# Altium PCB PCB1.PcbDoc
Units mil, origin at the board's own origin, x right, y up, seen from the top; angles counter-clockwise.
Board outline 4190.03 x 4245.03 mil, 2 copper layers (Top Layer, Bottom Layer); 62 components, 61 nets, 245 pads, 35 vias.
Unrouted connection lines stored in the file: 2.
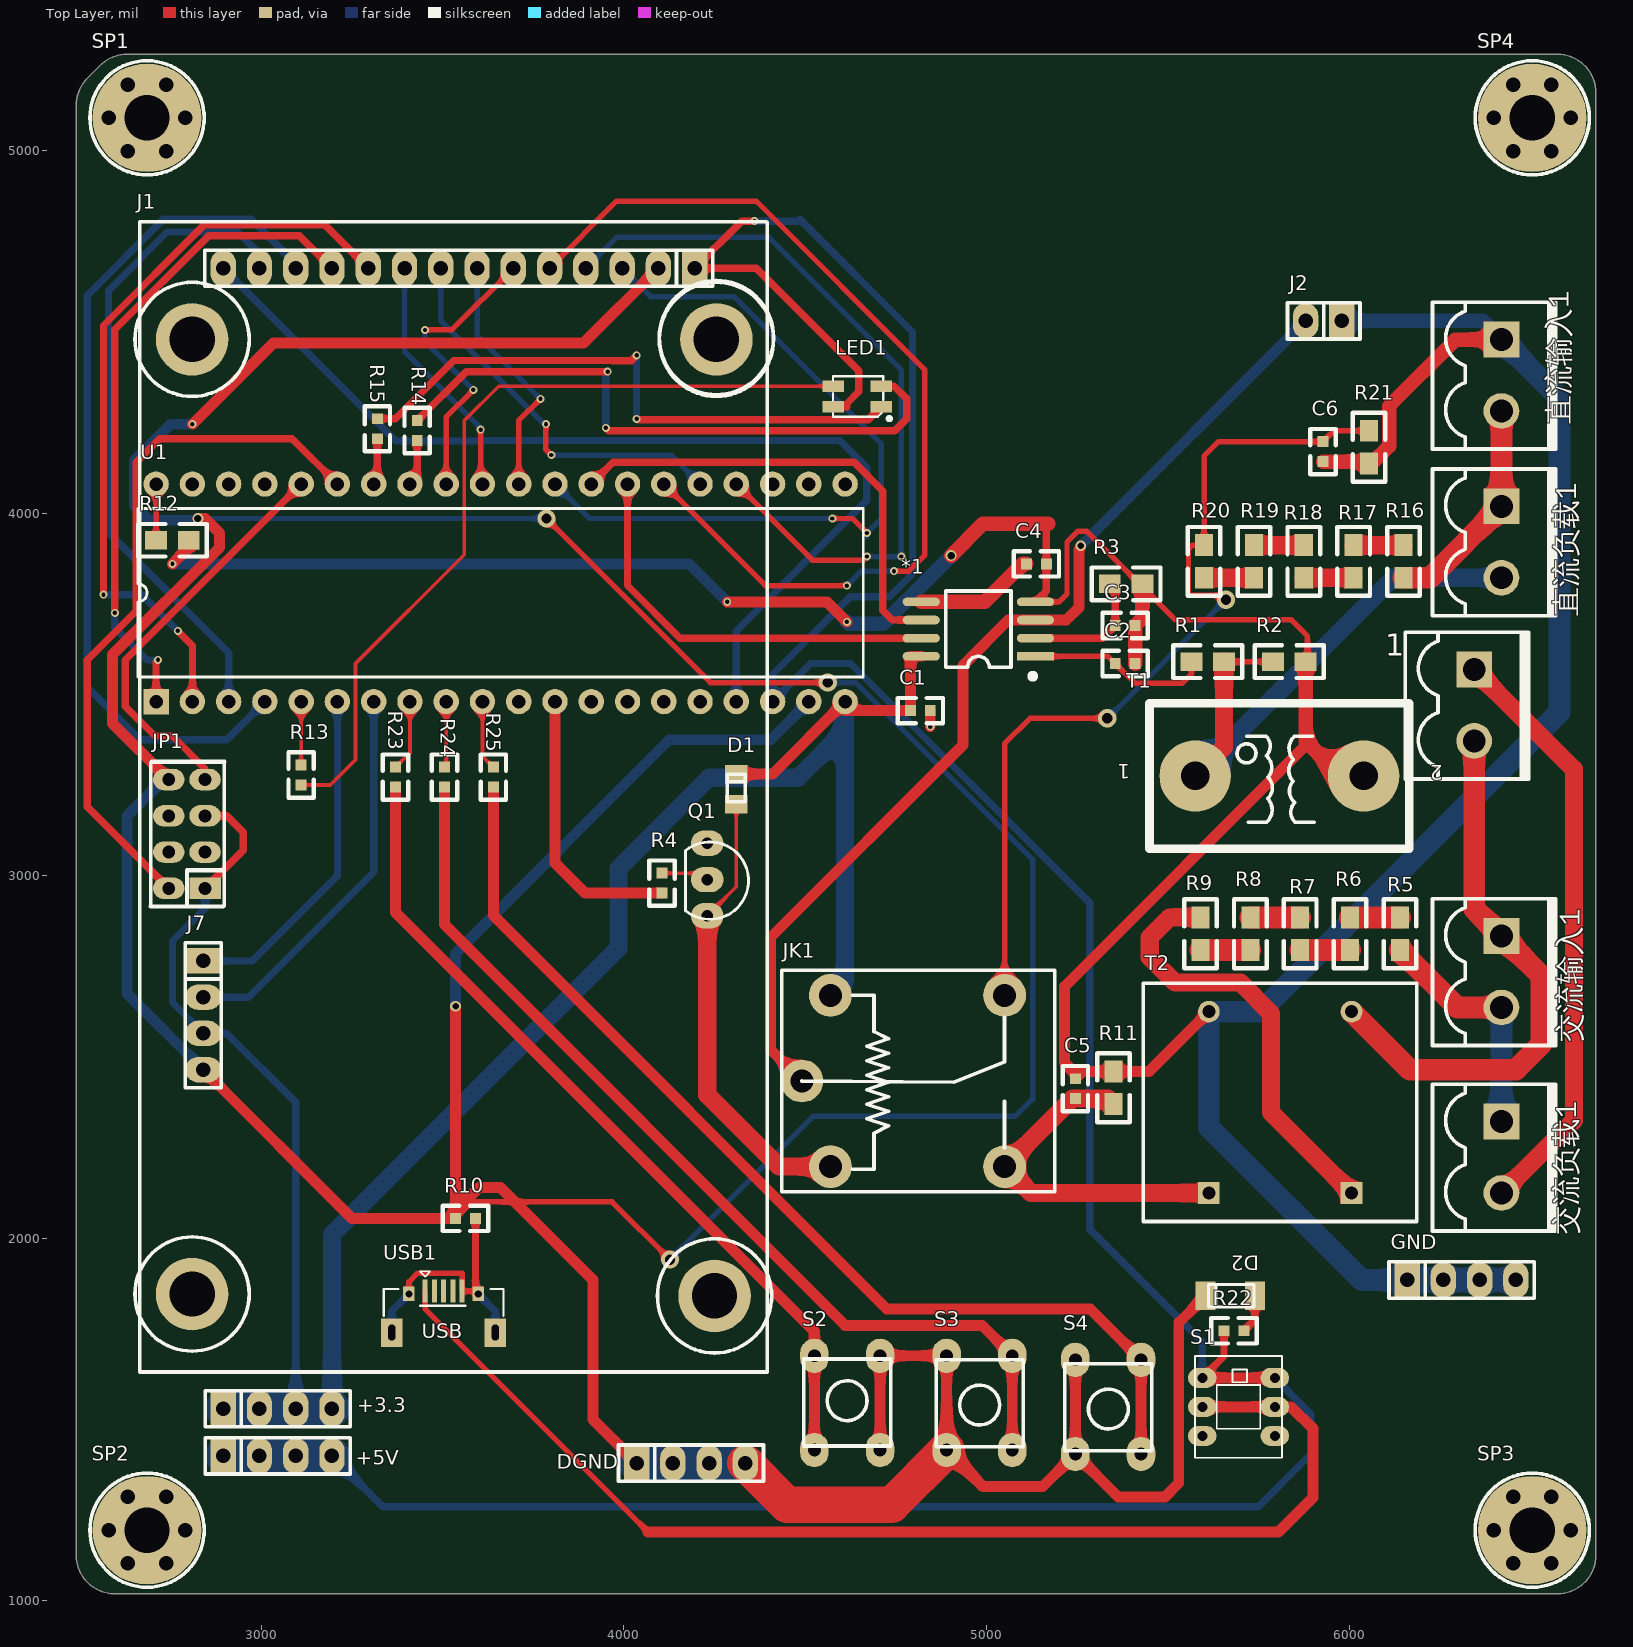
[diagram p0: Top Layer view]
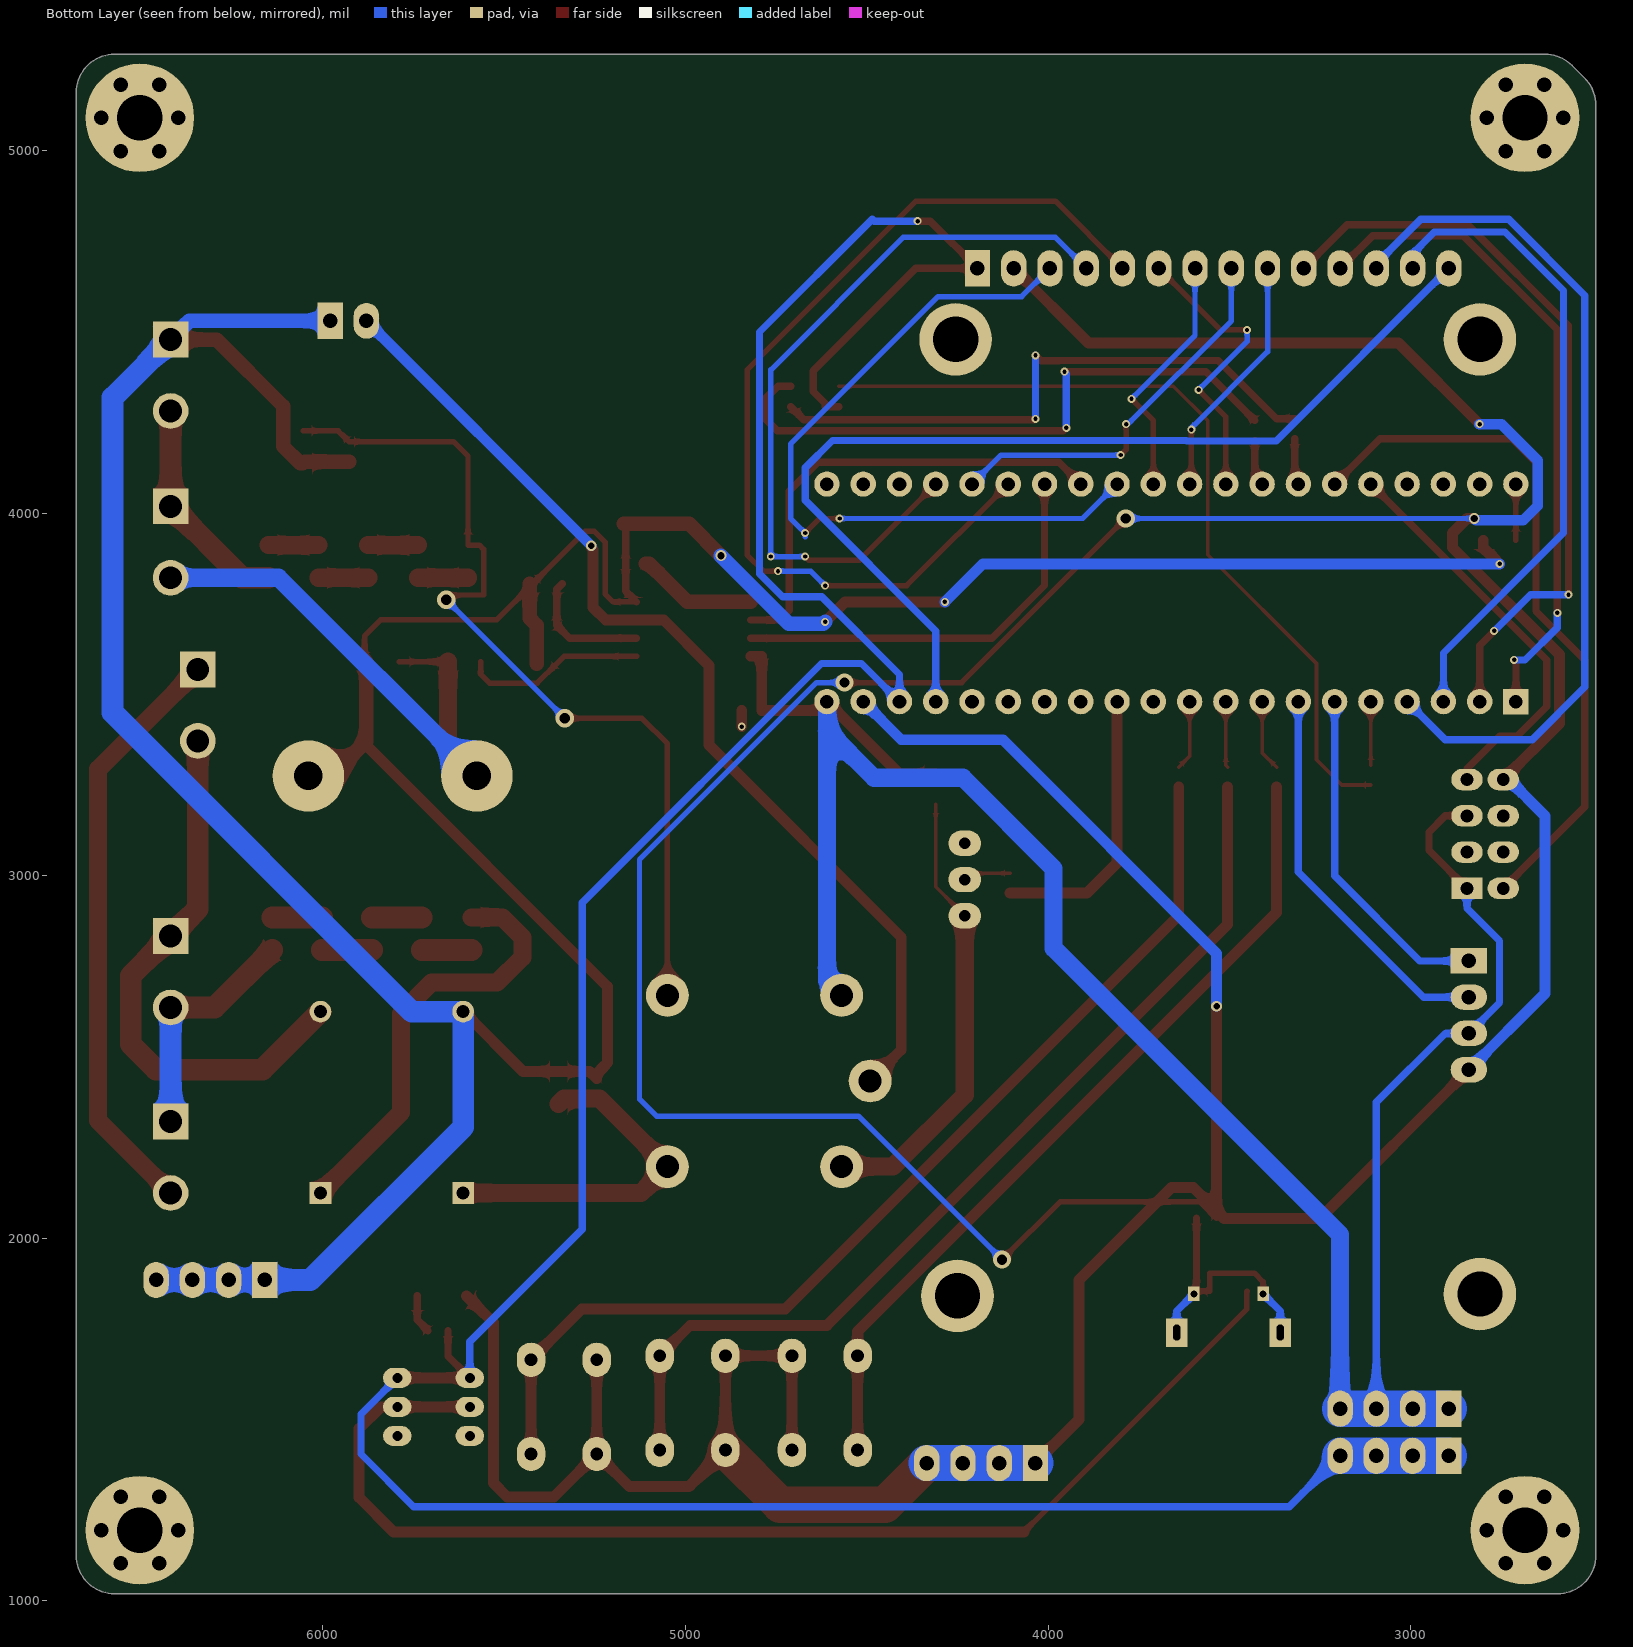
[diagram p1: Bottom Layer view, seen from below]

## Layer stack, top to bottom
Top Solder: solder mask 0.4, Solder Resist, Dk 3.5
Top Layer: signal copper 1.4
Dielectric 1: dielectric 12.6, FR-4, Dk 4.8
Bottom Layer: signal copper 1.4
Bottom Solder: solder mask 0.4, Solder Resist, Dk 3.5

## Board outline
2489.99,1125 2489.99,5125.38 cw(c2595,5125.38) 2520.74,5199.63 2555.37,5234.26 cw(c2629.62,5160) 2629.62,5265.02 6575,5265.02 cw(c6575,5160) 6680.02,5160 6680.02,1125 cw(c6575,1125) 6575,1019.99 2595,1019.99 cw(c2595,1125)

## Design rules (kind name [scope] priority, off if disabled: settings)
Clearance [All] p1: gap=10 ignorepadtopadclearanceinfootprint=FALSE except(0: Arc-Hole Track-Hole SMDPad-Hole THPad-Hole Via-Hole Fill-Hole Poly-Hole Region-Hole Text-Hole)
PolygonConnect [All] p1: connectstyle=Relief reliefconductorwidth=10 reliefentries=4 polygonreliefangle="90 Angle" airgapwidth=10
RoutingVias [All] p1: holewidth=28 width=50 viastyle="Through Hole" minholewidth=28 minwidth=50 maxholewidth=28 maxwidth=50
SolderMaskExpansion [All] p1: expansion=4
Width [All] p1: maxlimit=100 minlimit=10 preferedwidth=15
30 further rules are at their usual default settings.

## Components (designator, comment, footprint, x,y, rotation, side; value= is the part's Value field where it differs from the comment)
1 "导线" KF2EDGK5.0-LI-2P 6345,3470 r270 top
*1 "HLW8110" SOP8W_M 4977.52,3680 r180 top
+3.3 "CON4" sip-4 2895,1530 r0 top
+5V "CON4" sip-4 2895,1400 r0 top
C1 "0.1uf" 0603 4845,3455 r180 top
C2 "330nf" 0603 5355,3585 r0 top
C3 "330nf" 0603 5410,3690 r180 top
C4 "0.1uf" 0603 5110,3860 r0 top
C5 "33nf" 0603 5245,2385 r90 top
C6 "33nf" 0603 5928,4196.82 r270 top
D1 "1N4007" LED_0805 4310,3239.29 r90 top
D2 "LED" LED_1206 5672,1841.3 r180 top
DGND "CON4" sip-4 4035,1380 r0 top
GND "CON4" sip-4 6160,1885 r0 top
J1 "CON14" 2.4TFT 3495,1791.3 r180 top
J2 "测量点" sip-2 5980,4530 r180 top
J7 "CON4" sip-4 2840,2765 r270 top
JK1 "SRD-05VDC-SL-C" SRD-C_B 4569.69,2670 r0 top
JP1 "HEADER 4X2" IDC-8 2845,2965 r90 top
LED1 "RGB-3528" "LED 3528-4Pin" 4643.5,4321.46 r180 top
Q1 "SS8050" TO92A 4230,3089.29 r0 top
R1 "100R" 0805 5655,3590 r180 top
R2 "10R" 0805 5880,3590 r180 top
R3 "100R" 0805 5430,3805 r180 top
R4 "510" 0603 4105,2951.85 r90 top
R5 "20k" 0805 6140,2795 r90 top
R6 "20k" 0805 6002.5,2885 r270 top
R7 "20k" 0805 5865,2795 r90 top
R8 "20k" 0805 5727.5,2885 r270 top
R9 "20k" 0805 5590,2795 r90 top
R10 "0R" 0603 3535.71,2055 r0 top
R11 "100R" 0805 5350,2460 r270 top
R12 "0R" 0805 2800,3925 r180 top
R13 "510" 0603 3110,3305 r270 top
R14 "510" 0603 3430,4200 r90 top
R15 "310" 0603 3320,4205 r90 top
R16 "20K" 0805 6150,3821.57 r90 top
R17 "20K" 0805 6012.5,3911.57 r270 top
R18 "20K" 0805 5875,3821.57 r90 top
R19 "20K" 0805 5737.5,3911.57 r270 top
R20 "20K" 0805 5600,3821.57 r90 top
R21 "1k" 0805 6055,4136.82 r90 top
R22 "510" 0603 5655,1745 r0 top
R23 "510" 0603 3370,3299.29 r270 top
R24 "510" 0603 3505,3299.29 r270 top
R25 "510" 0603 3640,3299.29 r270 top
S1 "SW-DPDT" SWH7*7 5595,1455 r90 top
S2 "SW-PB" SW6*6 4525.41,1416.16 r90 top
S3 "SW-PB" SW6*6 5071.1,1676 r270 top
S4 "SW-PB" SW6*6 5426.1,1665 r270 top
SP1 "M3铜柱" M3x4+6_N 2685,5090 r0 top
SP2 "M3铜柱" M3x4+6_N 2685,1195 r0 top
SP3 "M3铜柱" M3x4+6_N 6505,1195 r0 top
SP4 "M3铜柱" M3x4+6_N 6505,5090 r0 top
T1 "Current transformer" ZMCT103E 5575.43,3275 r180 top
T2 "DA101C" ZMPT101B 5810,2375 r180 top
U1 "STM32F103C8T6核心板" STM32F103C8T6核心板 3650,3885 r90 top
USB1 "USB-5P" USB-MICRO_A 3502.72,1740 r0 top
交流负载1 "负载" KF2EDGK5.0-LI-2P 6420,2223.43 r270 top
交流输入1 "AC_IN" KF2EDGK5.0-LI-2P 6420,2735 r270 top
直流负载1 "负载" KF2EDGK5.0-LI-2P 6420,3920 r270 top
直流输入1 "DC-IN" KF2EDGK5.0-LI-2P 6420,4380 r270 top

## Footprints (in the part's own frame and the unit in brackets; to place one, negate y for a bottom-side part, rotate by r counter-clockwise, add the part's x,y. Pads: shape width x height; smd on the part's side, far side on the other; paste and mask are expansions set on the pad)
2.4TFT [mil]
  round 200 hole 125: 0(-760,-2687.79) 0(-755,-50) 0(685.67,-55) 0(685.67,-2687.79)
  oval 70x100 hole 40: 1(600,-2883.7) 2(500,-2883.7) 3(400,-2883.7) 4(300,-2883.7) 5(200,-2883.7) 6(100,-2883.7) 7(0,-2883.7) 8(-100,-2883.7) 9(-200,-2883.7) 10(-300,-2883.7) 11(-400,-2883.7) 12(-500,-2883.7) 13(-600,-2883.7)
  rect 70x100 hole 40: 14(-700,-2883.7)
  silkscreen extent -917,-3012 843,160, body extent -866,-2785 792,43, height 159
0603 [mil]
  rect 30x30 smd: 1(0,0) 2(55,0)
  silkscreen extent -35,-35 90,35
0805 [mil]
  rect 60x50 smd: 1(0,0) 2(90,0)
  silkscreen extent -50,-45 140,45
IDC-8 [mm]
  rect 1.5x2.2 hole 0.9: 1(0,0)
  oval 1.5x2.2 hole 0.9: 2(0,2.54) 3(2.54,0) 4(2.54,2.54) 5(5.08,0) 6(5.08,2.54) 7(7.62,0) 8(7.62,2.54)
  silkscreen extent -1.27,-1.36 8.88,3.81
KF2EDGK5.0-LI-2P [mm] "立插端子                  淘宝ID:黄晶宝石"
  rect 2.5x2.5 hole 1.6: 1(-2.5,0)
  round 2.5 hole 1.6: 2(2.5,0)
  silkscreen extent -5.12,-4.83 5.17,3.81, body extent -5.04,-4.75 5.04,3.75, height 11.25
"LED 3528-4Pin" [mm] "4脚，3528LED                             淘宝ID:黄晶宝石"
  rect 1.5x0.8 smd: 1(-1.689,0.725) 2(-1.689,-0.725) 3(1.689,-0.725) 4(1.689,0.725)
  silkscreen extent -2.37,-1.42 1.69,1.68, body extent -1.75,-1.4 1.75,1.4, height 1.95
LED_0805 [mm]
  rect 1.3x1.6 smd: 1(-1.067,0) 2(1.041,0)
  silkscreen extent -0.89,-0.64 1.02,0.64
LED_1206 [mm]
  rect 1.4x2 smd: 1(-1.727,0) 2(1.727,0)
  silkscreen extent -1.68,-0.79 1.52,0.79, body extent -1.65,-0.79 1.55,0.81, height 1.11
M3x4+6_N [mil] "M3铜柱，长：4mm，螺纹长：6mm"
  round 40 hole 40: 1(-106,0) 1(-53,-91.8) 1(-53,91.8) 1(53,-91.8) 1(53,91.8) 1(106,0)
  round 300 hole 125: 1(0,0)
  silkscreen extent -157,-157 157,157, body extent -106,-93 106,93, height 159
sip-2 [mil]
  rect 70x100 hole 40: 1(0,0)
  oval 70x98.42 hole 40: 2(100,0)
  silkscreen extent -50,-50 150,50
sip-4 [mil]
  rect 70x100 hole 40: 1(0,0)
  oval 70x100 hole 40: 2(100,0) 3(200,0) 4(300,0)
  silkscreen extent -50,-50 350,50
SOP8W_M [mm] "5.3*8.3*1.8mm（长宽高）  淘宝ID:黄晶宝石"
  rect 2.6x0.6 smd: 1(-4,1.905)
  oval 2.6x0.6 smd: 2(-4,0.635) 3(-4,-0.635) 4(-4,-1.905) 5(4,-1.905) 6(4,-0.635) 7(4,0.635) 8(4,1.905)
  silkscreen extent -3.94,-2.67 2.29,3.43, body extent -3.94,-2.64 3.94,2.64, height 1.9
SRD-C_B [mm] "单刀双投                  淘宝ID:黄晶宝石"
  round 3 hole 1.6: 1(0,0) 2(0,-12) 3(-2,-6) 4(12.2,0) 5(12.2,-12)
  silkscreen extent -3.4,-13.75 15.7,1.75, body extent -3.4,-13.75 15.7,1.75, height 15.6
STM32F103C8T6核心板 [mil]
  round 70 hole 37.4: 1(195,940) 2(195,840) 3(195,740) 4(195,640) 5(195,540) 6(195,440) 7(195,340) 8(195,240) 9(195,140) 10(195,40) 11(195,-60) 12(195,-160) 13(195,-260) 14(195,-360) 15(195,-460) 16(195,-560) 17(195,-660) 18(195,-760) 19(195,-860) 20(195,-960) 21(-405,-960) 22(-405,-860) 23(-405,-760) 24(-405,-660) 25(-405,-560) 26(-405,-460) 27(-405,-360) 28(-405,-260) 29(-405,-160) 30(-405,-60) 31(-405,40) 32(-405,140) 33(-405,240) 34(-405,340) 35(-405,440) 36(-405,540) 37(-405,640) 38(-405,740) 39(-405,840)
  rect 70x70 hole 37.4: 40(-405,940)
  silkscreen extent -337,-1010 127,990
SW6*6 [mm]
  oval 2.4x2 hole 0.9: 1(0,0) 1(6.6,0) 2(0,-4.6) 2(6.6,-4.6)
  silkscreen extent 0.28,-5.34 6.38,0.76
SWH7*7 [mm]
  oval 1.4x2 hole 0.7: 1(0,0) 2(2.032,0) 3(4.064,0) 4(4.064,-5.08) 5(2.032,-5.08) 6(0,-5.08)
  silkscreen extent -1.52,-5.59 5.59,0.51
TO92A [mil]
  oval 90x70 hole 31.5: 1(0,0) 2(0,-100) 3(0,-200)
  silkscreen extent -60,-209 114,4
USB-MICRO_A [mm] "micro型USB ，5.7*7.8*2.5mm"
  rect 0.35x1.6 smd: 1(-1.3,2.9) 2(-0.65,2.9) 3(0,2.9) 4(0.65,2.9) 5(1.3,2.9)
  rect 1.5x2 hole 0.5 slot 1.1 at 90 deg: 5(-3.625,0) 5(3.625,0)
  rect 0.8x1 hole 0.5: 5(-2.425,2.71) 5(2.425,2.71)
  silkscreen extent -4.19,-2.79 4.19,4.3, body extent -4,-2.71 4,2.89, height 2.8
ZMCT103E [mm] "102mm*182mm"
  round 5 hole 2: 1(0,0) 2(-11.8,0)
  silkscreen extent -15,-5.1 3.2,5.1
ZMPT101B [mil]
  rect 60x60 hole 35.98: 1(-196.85,250) 3(196.85,250)
  round 60 hole 35.98: 2(-196.85,-250) 4(196.85,-250)
  silkscreen extent -376,-329 378,329

## Part data
1 R1 R2 R3 R4 R5 R6 R7 R8 R9 R10 R11 R12 R13 R14 R15 R16 R17 R18 R19 R20 R21 R22 R23 R24 R25 交流负载1 直流负载1: library part RES, "电阻"
+3.3 +5V DGND GND J1 J7: "Connector"
C1 C2 C3 C4 C5 C6: library part CAP1
D1: library part DIODE
J2 交流输入1 直流输入1: library part CON2, "Connector"
JK1: "5V一组转换"
LED1: library part "LED-RGB 3528", "3528三基色LED"
Q1: library part 8050-DIP, "高频放大-NPN型", BOM名称=高频放大, 学习资源=https://shop463601444.taobao., 属性="40V 1.5A 1W 100MH", 版权归属=封装库来自淘
SP1 SP2 SP3 SP4: library part 铜柱加头大焊盘, "铜柱"
T2: library part DA10XC, "数字隔离变压器", ROM名称=数字隔, 学习资源=www.ooocke.
USB1: "微型USB母座"

## Via types
v1: diameter 22, hole 12, Top Layer to Bottom Layer, 26 vias
v2: diameter 50, hole 28, Top Layer to Bottom Layer, 5 vias
v3: diameter 30, hole 20, Top Layer to Bottom Layer, 2 vias
v4: diameter 30, hole 18, Top Layer to Bottom Layer, 2 vias

## Nets (pads, with @x,y where several pads share a name; then routed paths per layer and width w, separated by ;. In a path a pad name is that pad's centre, name@x,y a point inside that pad or via, vN(x,y) a via of type N, cw(c..) or ccw(c..) an arc to the next point about the centre after c; other vN are vias at no path point)
+3.3V: *1.8 +3.3.1 +3.3.2 +3.3.3 +3.3.4 C1.2 D1.2 J7.3 JK1.1 JP1.1 JP1.5 U1.21 | length 6467.4
  Top Layer w20: JP1.1 2950,3070 2950,3120 2905,3165 JP1.5
  Top Layer w30: D1.2 4410.29,3280.29 U1.21 4610,3455 C1.2 4790,3605 *1.8
  Bottom Layer w20: JP1.1 2845,2910 2755,2820 2755,2650 J7.3 2905,2565 3095,2375 +3.3.3
  Bottom Layer w50: +3.3.4 3195,2010 3985,2800 3985,3020 4235,3270 4480,3270 4610,3400 ; JK1.1 4610,2710.32 4610,3400 ; U1.21 4610,3400
  Bottom Layer w100: +3.3.1 +3.3.2 +3.3.3 +3.3.4
+5V: +5V.1 +5V.2 +5V.3 +5V.4 J1.14 LED1.4 R22.1 S1.3 S1.4 U1.23 | length 9103.7
  Top Layer w20: v1(4360,4805) 4325,4805 J1.14 4365,4675 4647.91,4392.09 4647.91,4335 4615,4302.09 4615,4292.91 LED1.4 ; S1.3 5655,1675 R22.1
  Top Layer w30: S1.3 S1.4
  Bottom Layer w20: +5V.4 3335,1260 5750,1260 5895,1405 5895,1515 S1.4 ; v1(4360,4805) 4480,4805 4485,4810 4796,4499 4796,3832.57 4732.43,3769 4624,3769 4410,3555 U1.23 4515,3585 4625,3585 5285,2925 5285,2025 5595,1715 S1.3
  Bottom Layer w100: +5V.1 +5V.2 +5V.3 +5V.4
AC_C: C5.1 JK1.5 R11.2 T2.3 | length 977.1
  Top Layer w50: R11.2 5335,2385 C5.1 5237.44,2385 JK1.5 5122.56,2125 T2.3
connect_1: R1.1 R2.2 T1.1 直流负载1.2 | length 1553.9
  Top Layer w15: R1.1 R2.2
  Top Layer w50: T1.1 5655,3354.57 R1.1
  Bottom Layer w50: T1.1 6122.01,3821.57 直流负载1.2
CS: J1.12 U1.12 | length 2103.5
  Top Layer w15: v1(4575,3985) 4630,3985 v1(4670,3945)
  Bottom Layer w15: U1.12 3905,3985 v1(4575,3985) ; J1.12 4073.41,4596.59 4303.67,4596.59 4710,4190.26 4710,3985 v1(4670,3945) v1@4670,3935
DC: J1.10 U1.15 | length 2685.4
  Top Layer w15: J1.10 3980,4860 4365,4860 4830,4395 4830,3885 4785,3840 v1(4745,3840) ; U1.15 4390,3800 v1(4615,3800)
  Bottom Layer w15: v1(4615,3800) 4655,3840 v1(4745,3840)
DC_C: C6.1 JK1.4 R20.2 R21.2 | length 2479.8
  Top Layer w15: JK1.4 5050,3364 5120,3434 v2(5333,3434) ; v2(5660,3761) 5646.93,3774.07 5557,3774.07 5557,3900 5568.57,3911.57 R20.2 5600,4156.82 5640,4196.82 C6.1 5958,4226.82 R21.2
  Bottom Layer w15: v2(5333,3434) v2(5660,3761)
DGND: D2.2 DGND.1 DGND.2 DGND.3 DGND.4 J1.13 J7.4 JP1.8 Q1.1 R10.1 S2.2 S3.2 S4.2 U1.22 | length 16252.8
  Top Layer w15: R10.1 3581.42,2100.71 3967.29,2100.71 v2(4127,1941) ; v2(3786.11,3985) 4238.61,3532.5 v2(4562,3532.5)
  Top Layer w30: JP1.8 2590,3420 2590,3609.5 2885,3904.5 2885,3945 2845,3985 v3(2825,3985) ; v1(2810,4245) 3034,4469 3889,4469 J1.13 J1.13@4100,4680 ; J7.4 3250,2055 3515,2055 3535.71,2075.71 ; v4(3535.71,2640) 3535.71,2075.71 ; DGND.1 3915,1500 3915,1885 3660,2140 3600,2140 3535.71,2075.71 ; S2.2@4706.51,1416.16 4706.51,1676 4890,1676 4890,1416.16 4991.16,1315 5154.84,1315 S4.2@5245,1405.16 ; S4.2@5245,1665 S4.2@5245,1405.16 ; D2.2 5530,1767.3 5530,1325 5491.8,1286.8 5363.36,1286.8 S4.2@5245,1405.16
  Top Layer w100: DGND.4 4450,1265 4738.84,1265 S3.2@4890,1416.16
  Bottom Layer w15: v3(2825,3985) v2(3786.11,3985) ; v2(4127,1941) 4523,2337 5080,2337 5127,2384 5127,3044.11 4638.61,3532.5 v2(4562,3532.5)
  Bottom Layer w30: JP1.8 2730,3265 2630,3165 2630,2675 J7.4 ; v1(2810,4245) 2750,4245 2650,4145 2650,4020 2690,3980 v3@2820,3980 ; v4(3535.71,2640) 3535.71,2785.71 4125,3375 4405,3375 U1.22
  Bottom Layer w100: DGND.1 DGND.2 DGND.3 DGND.4
GND: *1.4 C1.1 C2.2 C3.1 C4.2 C5.2 C6.2 GND.1 GND.2 GND.3 GND.4 J2.1 R2.1 R3.1 R11.1 R12.1 R21.1 T1.2 T2.4 直流输入1.1 | length 11489.7
  Top Layer w15: *1.4 5200,3755 5222,3777 5222,3920 5252,3950 5276,3950 5520,3706 5840,3706 5885,3661 5885,3595 5885,3375
  Top Layer w20: *1.4 5165,3785 C4.2 5165,3965 5170,3970
  Top Layer w30: v1(2755,3860) 2800,3905 R12.1 ; v1(4285,3755) 4560,3755 v1(4615,3700) ; v1(4845,3410.86) C1.1 ; C5.2 5265,2460 R11.1 5448.15,2460 T2.4 ; C5.2@5245,2454.29 5215,2484.29 5215,2693.9 5880,3358.9 5880,3370 5885,3375
  Top Layer w40: v3(4902.5,3882.5) 4990,3970 5170,3970 ; C2.2 C3.1 5430,3710 R3.1 ; R2.1@5885,3595 R2.1 5880,3370 5975,3275 T1.2 ; C6.2 6050,4141.82 R21.1 6062.43,4136.82 6110,4184.39 6110,4295.14 6293.29,4478.43 直流输入1.1
  Bottom Layer w30: v1(2755,3860) 4180,3860 v1(4285,3755)
  Bottom Layer w40: v1(4615,3700) 4620,3695 4715,3695 v3(4902.5,3882.5) ; J2.1 6368.43,4530 直流输入1.1
  Bottom Layer w60: 直流输入1.1 6580,4318.43 6580,3450 5755,2625 T2.4 5613.15,2306.85 6035,1885 GND.1 GND.2 GND.3 GND.4
L: R5.1 交流负载1.1 交流输入1.2 | length 660.3
  Top Layer w60: R5.1 6298.43,2636.57 交流输入1.2
  Bottom Layer w60: 交流负载1.1 交流输入1.2
LED_BACK: J1.7 U1.16 | length 1087.4
  Top Layer w15: v1(3785,4245) 3785,4175 v1(3800,4160)
  Bottom Layer w15: J1.7 3495,4530 3780,4245 v1(3785,4245) ; v1(3800,4160) 4130,4160 U1.16
MISO: J1.6 U1.10 | length 684.1
  Top Layer w15: v1(3605,4230) 3605,4085 U1.10
  Bottom Layer w15: J1.6 3395,4445 3605,4235 v1(3605,4230)
MOSI: J1.9 U1.9 | length 825.2
  Top Layer w15: v1(3451.54,4505) 3525,4505 J1.9 ; U1.9 3510,4265 v1(3585,4340)
  Bottom Layer w15: v1(3451.54,4505) 3451.54,4473.46 v1(3585,4340)
N: 1.2 T2.2 交流输入1.1 | length 1531.6
  Top Layer w60: T2.2 6166.85,2465 6460,2465 6530,2535 6530,2723.43 交流输入1.1 6345,2908.43 1.2
Net1_1: 1.1 交流负载1.2 | length 1640.2
  Top Layer w50: 1.1 6620,3293.43 6620,2325 交流负载1.2
Net*1_1: *1.1 C2.1 R1.2 | length 505
  Top Layer w15: *1.1 5335.01,3605 C2.1 5409,3531 5540,3531 5565,3556 R1.2
Net*1_2: *1.2 C3.2 R3.2 | length 355.7
  Top Layer w20: *1.2 5320,3655 C3.2 5355,3790 R3.2
Net*1_3: *1.3 J2.2 JK1.3 | length 2836.5
  Top Layer w30: JK1.3 4405,2519.72 4405,2830 4935,3360 4935,3580 5060,3705 *1.3 5220,3705 5255,3740 5255,3900 5260,3905 v4(5260,3910)
  Bottom Layer w30: v4(5260,3910) J2.2
Net*1_5: *1.5 C4.1 | length 333.5
  Top Layer w40: *1.5 4995,3755 5100,3860 C4.1
NetD1_1: D1.1 JK1.2 Q1.3 | length 1256.9
  Top Layer w10: Q1.3 4310,2969.29 D1.1
  Top Layer w50: Q1.3 4230,2395 4427.44,2197.56 JK1.2
NetD2_1: D2.1 R22.2 | length 108.7
  Top Layer w20: R22.2 5740,1775 D2.1
NetLED1_1: LED1.1 R15.2 | length 1654.3
  Top Layer w20: R15.2 3370,4260 3531,4421 3967.84,4421 3968.84,4420 4020,4420 v1(4035,4435) ; v1(4035,4260) 4037.84,4257.17 4674.25,4257.17 LED1.1
  Bottom Layer w20: v1(4035,4260) v1(4035,4435)
NetLED1_2: LED1.2 R14.2 | length 1724.3
  Top Layer w20: R14.2 3565,4390 v1(3955,4390) ; v1(3950,4235) 3957.83,4227.17 4747.17,4227.17 4780,4260 4780,4315 4745,4350 LED1.2
  Bottom Layer w20: v1(3950,4235) 3950,4385 v1(3955,4390)
NetLED1_3: LED1.3 R13.2 | length 2294.6
  Top Layer w10: R13.2 3190,3250 3260,3320 3260,3585 3560,3885 3560,4255 3655,4350 LED1.3
NetQ1_2: Q1.2 R4.2 | length 132.3
  Top Layer w10: R4.2 4212.44,3006.85 Q1.2
NetR5_2: R5.2 R6.1 | length 137.5
  Top Layer w60: R6.1 R5.2
NetR6_2: R6.2 R7.1 | length 137.5
  Top Layer w60: R7.1 R6.2
NetR7_2: R7.2 R8.1 | length 137.5
  Top Layer w60: R8.1 R7.2
NetR8_2: R8.2 R9.1 | length 137.5
  Top Layer w60: R9.1 R8.2
NetR9_2: R9.2 T2.1 | length 1203.9
  Top Layer w50: R9.2 5505,2885 5450,2830 5450,2775 5520,2705 5700,2705 5785,2620 5785,2346.85 T2.1
NetR10_2: R10.2 USB1.5 | length 740.5
  Top Layer w15: USB1.5@3407.24,1846.69 3407.24,1880 3431.24,1904 3553.9,1904 3553.9,1854.17 USB1.5@3590.71,1854.17
  Top Layer w20: R10.2 3590.71,1854.17 USB1.5@3598.19,1846.69
  Bottom Layer w20: USB1.5@3360,1740 3360,1799.45 USB1.5@3407.24,1846.69 ; USB1.5@3598.19,1846.69 3645.43,1799.45 USB1.5@3645.43,1740
NetR12_2: R12.2 U1.1 | length 155
  Top Layer w15: R12.2 U1.1
NetR16_1: R16.1 直流负载1.1 直流输入1.2 | length 614.7
  Top Layer w60: R16.1 6223.15,3821.57 直流负载1.1 直流输入1.2
NetR16_2: R16.2 R17.1 | length 137.5
  Top Layer w50: R17.1 R16.2
NetR17_2: R17.2 R18.1 | length 137.5
  Top Layer w50: R18.1 R17.2
NetR18_2: R18.2 R19.1 | length 137.5
  Top Layer w50: R19.1 R18.2
NetR19_2: R19.2 R20.1 | length 137.5
  Top Layer w50: R20.1 R19.2
NetR23_2: R23.2 S2.1 | length 2306.7
  Top Layer w30: R23.2 3370,2898.08 4525.41,1742.67 4525.41,1676 S2.1@4525.41,1416.16
NetR24_2: R24.2 S3.1 | length 2697.7
  Top Layer w30: R24.2 3505,2865 4610,1760 4987.1,1760 5071.1,1676 S3.1@5071.1,1416.16
NetR25_2: R25.2 S4.1 | length 2907.6
  Top Layer w30: R25.2 3640,2890 4725,1805 5286.1,1805 5426.1,1665 S4.1@5426.1,1405.16
PA11: R23.1 U1.33 | length 197.3
  Top Layer w10: R23.1 3410,3339.29 U1.33
PA12: R24.1 U1.32 | length 182.8
  Top Layer w10: R24.1 3510,3304.29 U1.32
PA15: R25.1 U1.31 | length 193.1
  Top Layer w10: U1.31 3610,3329.29 R25.1
PB4: R4.1 U1.29 | length 774.4
  Top Layer w30: U1.29 3810,3035 3893.15,2951.85 R4.1
Power_In: S1.2 S1.5 USB1.1 | length 3311.5
  Top Layer w15: USB1.1 3452.74,1852.97 3452.74,1803.98 4066.72,1190
  Top Layer w30: 4066.72,1190 5805,1190 5900,1285 5900,1475 5840,1535 S1.5 S1.2
RST: J1.11 U1.17 | length 2126.7
  Top Layer w15: U1.17 4520,3870 4660,3870 v1(4670,3880)
  Bottom Layer w15: J1.11@3895,4670 J1.11 3980,4760 4400,4760 4765,4395 v1(4765,3880) 4760,3885 4755,3880 v1(4670,3880)
RX_measure: *1.6 U1.13 | length 1308.4
  Top Layer w20: U1.13 3970,4140 4635,4140 4714,4061 4714,3731 4740,3705 *1.6
RX_PC: J7.2 U1.34 | length 1082.9
  Bottom Layer w20: J7.2 2965,2665 3310,3010 U1.34
RX_WIFI: JP1.7 U1.5 | length 1135.3
  Top Layer w20: JP1.7 2845,3295 2755,3385 2706.72,3385 2625,3466.72 2625,3595 U1.5
SCK: J1.8 U1.11 | length 692.3
  Top Layer w15: U1.11 3710,4255 v1(3770,4315)
  Bottom Layer w15: J1.8 3595,4490 v1(3770,4315)
SPI2_MISO: J1.2 U1.38 | length 1818.6
  Bottom Layer w20: U1.38 2910,3614.33 2579,3945.33 2579,4614 2740,4775 2935,4775 2995,4715 J1.2
SPI2_MOSI: J1.3 U1.37 | length 2398.7
  Bottom Layer w20: U1.37 2905,3375 2665,3375 2520,3520 2520,4600 2730,4810 2972.43,4810 3095,4687.43 J1.3
SPI2_NSS: J1.4 U1.40 | length 1838.5
  Top Layer w20: v1(2596,3725) 2596,4506 2855,4765 3105,4765 J1.4 ; U1.40 2710,3590 v1(2715,3595)
  Bottom Layer w20: v1(2596,3725) 2596,3684 2685,3595 v1(2715,3595)
SPI2_SCK: J1.5 U1.39 | length 2095.1
  Top Layer w20: v1(2565,3775) 2565,4517.43 2842.57,4795 3175,4795 J1.5 ; v1(2770,3675) 2810,3635 U1.39
  Bottom Layer w20: v1(2565,3775) 2670,3775 v1(2770,3675)
TFT_PB9: J1.1 U1.24 | length 2797.8
  Bottom Layer w20: J1.1 3371,4199 3617.84,4199 3618.84,4200 4595,4200 4670,4125 4670,4035 4310,3675 U1.24
TIM1_CH1: R13.1 U1.36 | length 175
  Top Layer w10: R13.1 U1.36
TIM3_TH3: R14.1 U1.8 | length 128.3
  Top Layer w20: U1.8 3430,4100 R14.1
TIM3_TH4: R15.1 U1.7 | length 129.1
  Top Layer w20: U1.7 3320,4090 R15.1
TX_measure: *1.7 U1.14 | length 1150.1
  Top Layer w20: U1.14 4010,3800 4155,3655 *1.7
TX_PC: J7.1 U1.35 | length 947.3
  Bottom Layer w20: J7.1 2975,2765 3210,3000 U1.35
TX_WIFI: JP1.2 U1.6 | length 1957.8
  Top Layer w20: JP1.2 2520,3190 2520,3595 2655,3730 2655,4140 2720,4205 3085,4205 U1.6
pads on no net: J1.0 JP1.3 JP1.4 JP1.6 S1.1 S1.6 SP1.1 SP2.1 SP3.1 SP4.1 U1.2 U1.3 U1.4 U1.18 U1.19 U1.20 U1.25 U1.26 U1.27 U1.28 U1.30 USB1.2 USB1.3 USB1.4

## Polygon pours and split planes (outlines as drawn)
GND on Bottom Layer "Bottom Layer-GND 1" (solid, remove dead copper, pour order 16): 5035,4565

## Silkscreen, mask and mechanical layers (free items; w line width, h text height)
Mechanical 1:
  lines w10: 2495,5075 2495,5125.38 cw(c2595,5125.38) 2524.29,5196.09 2558.91,5230.71 cw(c2629.62,5160) 2629.62,5260 2680,5260 6500,5260 6575,5260 cw(c6575,5160) 6675,5160 6675,5095 6675,1195 6675,1125 cw(c6575,1125) 6575,1025 6510,1025 2935,1025 2595,1025 cw(c2595,1125) 2495,1125 2495,1200 2495,5085

## Text inside footprints (layer, text, board x,y; h text height)
T1: Top Overlay "1" at 5396.56,3307.7 h40 r180; Top Overlay "2" at 6258.24,3304.55 h40 r180
USB1: Top Overlay "USB" at 3442.72,1724.17 h40